# EAGLE board TSOC_NEOLED_28pin (EAGLE 6.6.0)
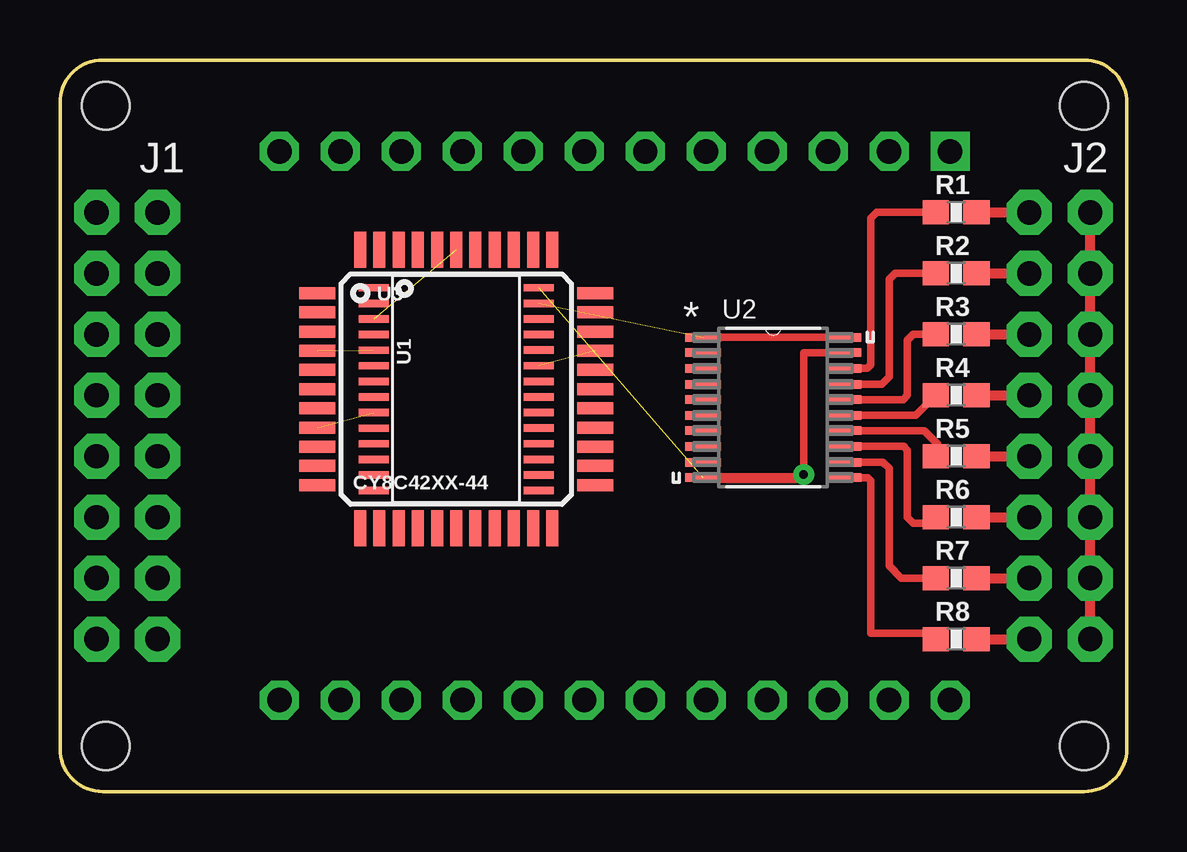
[diagram p0: board, top side]
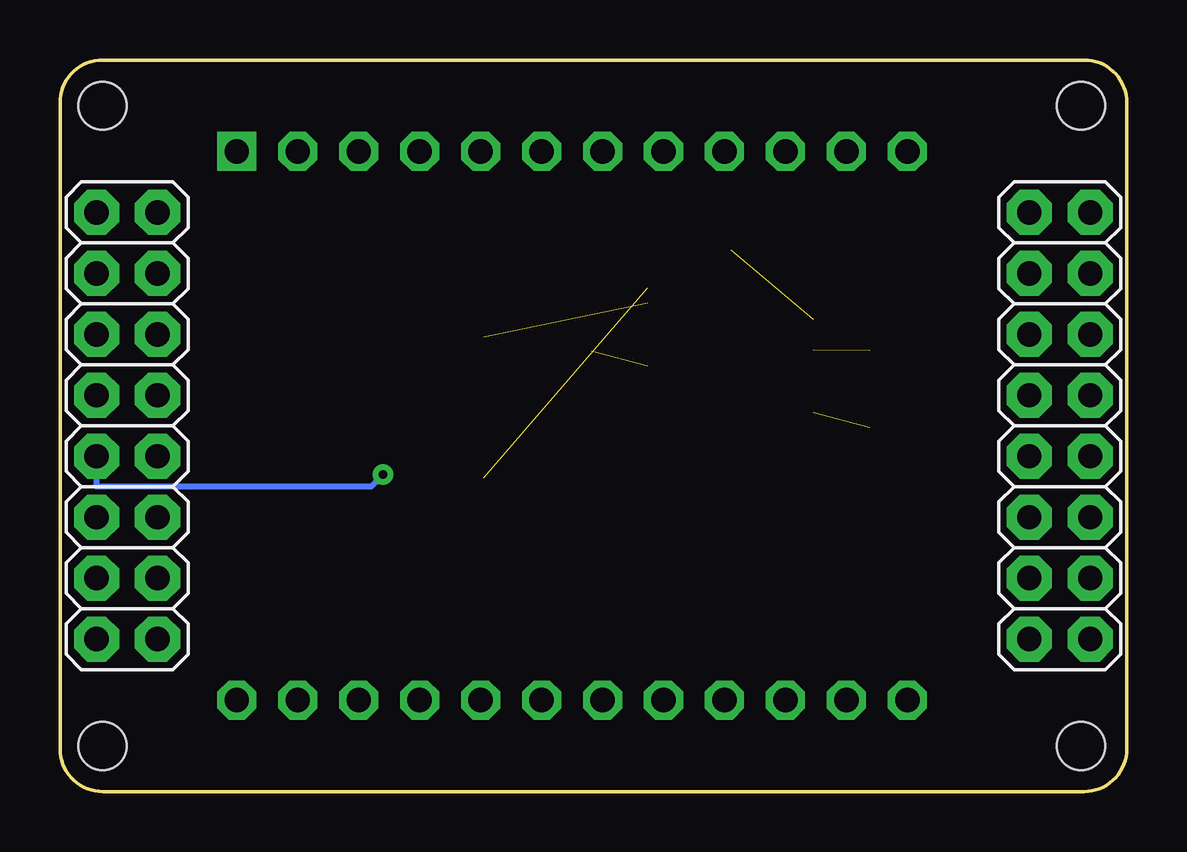
[diagram p1: board, bottom side, seen from below]

Size 44.45 x 30.48 mm. Coordinates in mm from the lower left corner, seen from the top.
Copper layers (1*16): Top 0.035mm / dielectric 1.5mm / Bottom 0.035mm
Design rules "PatternAgents_7mil": minimum track width 7mil, minimum drill 14mil, track to track 7mil, track to pad 7mil, pad to pad 7mil, via to via 7mil, smd to smd 7mil, copper to edge 7mil, drill to drill 7mil, minimum pad ring 12mil, minimum via ring 10mil, stop-mask expansion 4mil, vias tented up to drill 25mil, thermal gap 7mil

## Footprints (pad centres in the part's own frame; a part is rotated, then mirrored left to right if it is on the bottom)
2X8 = drill 1.016 pad 1.88 octagon: 1 0,0; 2 0,2.54; 3 2.54,0; 4 2.54,2.54; 5 5.08,0; 6 5.08,2.54; 7 7.62,0; 8 7.62,2.54; 9 10.16,0; 10 10.16,2.54; 11 12.7,0; 12 12.7,2.54; 13 15.24,0; 14 15.24,2.54; 15 17.78,0; 16 17.78,2.54
0603-RES = smd 1.1 x 1: 1 -0.85,0; 2 0.85,0
TSOC-BB-S24 = drill 1.016 square: 1B -11.43,-11.43 | drill 1.016 octagon: 1C -11.43,11.43; 2B -8.89,-11.43; 2C -8.89,11.43; 3B -6.35,-11.43; 3C -6.35,11.43; 4B -3.81,-11.43; 4C -3.81,11.43; 5B -1.27,-11.43; 5C -1.27,11.43; 6B 1.27,-11.43; 6C 1.27,11.43; 7B 3.81,-11.43; 7C 3.81,11.43; 8B 6.35,-11.43; 8C 6.35,11.43; 9B 8.89,-11.43; 9C 8.89,11.43; 10B 11.43,-11.43; 10C 11.43,11.43; 11B 13.97,-11.43; 11C 13.97,11.43; 12B 16.51,-11.43; 12C 16.51,11.43
SSOP28 = smd 0.305 x 1.245: 1 4.224,3.441; 2 3.574,3.441; 3 2.924,3.441; 4 2.274,3.441; 5 1.624,3.441; 6 0.974,3.441; 7 0.325,3.44; 8 -0.326,3.441; 9 -0.976,3.441; 10 -1.626,3.441; 11 -2.276,3.441; 12 -2.926,3.441; 13 -3.576,3.441; 14 -4.226,3.441; 15 -4.224,-3.441; 16 -3.574,-3.441; 17 -2.924,-3.441; 18 -2.274,-3.441; 19 -1.624,-3.441; 20 -0.974,-3.441; 21 -0.324,-3.441; 22 0.326,-3.441; 23 0.976,-3.441; 24 1.626,-3.441; 25 2.276,-3.441; 26 2.926,-3.441; 27 3.576,-3.441; 28 4.226,-3.441
SOP65P640X120-20N = smd 1.473 x 0.356: 1 -2.921,2.921; 2 -2.921,2.286; 3 -2.921,1.626; 4 -2.921,0.965; 5 -2.921,0.33; 6 -2.921,-0.33; 7 -2.921,-0.965; 8 -2.921,-1.626; 9 -2.921,-2.286; 10 -2.921,-2.921; 11 2.921,-2.921; 12 2.921,-2.286; 13 2.921,-1.626; 14 2.921,-0.965; 15 2.921,-0.33; 16 2.921,0.33; 17 2.921,0.965; 18 2.921,1.626; 19 2.921,2.286; 20 2.921,2.921
TQFP-10X10-44 = smd 1.5 x 0.5: 1 -5.8,4; 2 -5.8,3.2; 3 -5.8,2.4; 4 -5.8,1.6; 5 -5.8,0.8; 6 -5.8,0; 7 -5.8,-0.8; 8 -5.8,-1.6; 9 -5.8,-2.4; 10 -5.8,-3.2; 11 -5.8,-4; 23 5.8,-4; 24 5.8,-3.2; 25 5.8,-2.4; 26 5.8,-1.6; 27 5.8,-0.8; 28 5.8,0; 29 5.8,0.8; 30 5.8,1.6; 31 5.8,2.4; 32 5.8,3.2; 33 5.8,4 | smd 0.5 x 1.5: 12 -4,-5.8; 13 -3.2,-5.8; 14 -2.4,-5.8; 15 -1.6,-5.8; 16 -0.8,-5.8; 17 0,-5.8; 18 0.8,-5.8; 19 1.6,-5.8; 20 2.4,-5.8; 21 3.2,-5.8; 22 4,-5.8; 34 4,5.8; 35 3.2,5.8; 36 2.4,5.8; 37 1.6,5.8; 38 0.8,5.8; 39 0,5.8; 40 -0.8,5.8; 41 -1.6,5.8; 42 -2.4,5.8; 43 -3.2,5.8; 44 -4,5.8
TSOC-BB-BRD = hole 2: 1.905,1.905; 28.575,1.905; 1.905,42.672; 28.575,42.672

## Placement (x,y rotation side)
J1  [2X8]  4.06,24.13 270 bottom
J2  [2X8]  42.93,24.13 270 bottom
R1  [0603-RES]  37.34,24.13 0 top
R2  [0603-RES]  37.34,21.59 0 top
R3  [0603-RES]  37.34,19.05 0 top
R4  [0603-RES]  37.34,16.51 0 top
R5  [0603-RES]  37.34,13.97 0 top
R6  [0603-RES]  37.34,11.43 0 top
R7  [0603-RES]  37.34,8.89 0 top
R8  [0603-RES]  37.34,6.35 0 top
TSOC  TSOC-24-BB  [TSOC-BB-S24]  25.65,15.24 180 top
U1  CY8C4XXX-28  [SSOP28]  16.51,16.76 90 top
U2  SN74HC245PW  [SOP65P640X120-20N]  29.72,16 0 top
U3  CY8C42XX-44  [TQFP-10X10-44]  16.51,16.76 0 top
U$3  TSOC-PCB-SINGLE  [TSOC-BB-BRD]  0,30.48 270 top

## Library data of the parts
J1 J2 R1-R8 = PatternAgents-ProtoPads
TSOC U$3 = thingSoC
U1 U3 = PatternAgents-Cypress
U2 = PatternAgents-TI; MPN: SN74HC245PW; OC_FARNELL: 1236221; OC_NEWARK: 13M5213; PACKAGE: TSSOP-20; SUPPLIER: Texas Instruments

## Nets
!RST: U1.25
GND: J2.1 J2.3 J2.5 J2.7 J2.9 J2.11 J2.13 J2.15 U1.28 U2.10 U2.19
N$1: J2.2 R1.2
N$2: J2.4 R2.2
N$3: J2.6 R3.2
N$4: J2.8 R4.2
N$5: J2.10 R5.2
N$6: J2.12 R6.2
N$7: J2.14 R7.2
N$8: J2.16 R8.2
N$9: R1.1 U2.18
N$10: R2.1 U2.17
N$11: R3.1 U2.16
N$12: R4.1 U2.15
N$13: R5.1 U2.14
N$14: R6.1 U2.13
N$15: R7.1 U2.12
N$16: R8.1 U2.11
N$17: U2.2
N$18: U2.3
N$19: U2.4
N$20: U2.5
N$21: U2.6
N$22: U2.7
N$23: U2.8
N$24: U2.9
P0_0: U1.19
P0_1: U1.20
P0_2: U1.21
P0_3: U1.22
P0_6: U1.23 U3.30
P0_7: U1.24
P1_0: U1.1
P1_1: U1.2
P1_2: U1.3 U3.39
P1_7: U1.4
P2_2: U1.5 U3.4
P2_3: U1.6
P2_4: U1.7
P2_5: U1.8
P2_6: U1.9 U3.8
P2_7: U1.10
P3_0: U1.11
P3_1: U1.12
P3_2: U1.13
P3_3: U1.14
P3_6: U3.17
P4_0: U1.15
P4_1: U1.16
P4_2: U1.17
P4_3: U1.18
VCC: U1.27 U2.1 U2.20
VCCD: U1.26

## Tracks (layer width: path | path; a pad name or v marks a point on that pad's centre or on a via)
GND  (via drill 0.36)  (1 unrouted)
  Top 0.305: U2.19 30.99,18.29 v30.99,13.21
  Top 0.406: J2.15 J2.13 J2.11 J2.9 J2.7 J2.5 J2.3 J2.1 | U2.10 30.86,13.08 v30.99,13.21
  Bottom 0.254: v30.99,13.21 31.5,12.7 42.93,12.7 J2.9
N$1
  Top 0.406: R1.2 J2.2
N$2
  Top 0.406: R2.2 J2.4
N$3
  Top 0.406: R3.2 J2.6
N$4
  Top 0.406: R4.2 J2.8
N$5
  Top 0.406: R5.2 J2.10
N$6
  Top 0.406: R6.2 J2.12
N$7
  Top 0.406: R7.2 J2.14
N$8
  Top 0.406: R8.2 J2.16
N$9
  Top 0.305: U2.18 33.63,17.63 33.78,17.78 33.78,23.88 34.04,24.13 R1.1
N$10
  Top 0.305: U2.17 34.24,16.97 34.54,17.27 34.54,21.34 34.8,21.59 R2.1
N$11
  Top 0.305: U2.16 35.13,16.33 35.31,16.51 35.31,18.8 35.56,19.05 R3.1
N$12
  Top 0.305: U2.15 35.65,15.67 R4.1
N$13
  Top 0.305: U2.14 36.02,15.04 36.58,14.48 36.58,14.06 R5.1
N$14
  Top 0.305: U2.13 35.15,14.38 35.31,14.22 35.31,11.43 35.56,11.18 36.23,11.18 R6.1
N$15
  Top 0.305: U2.12 34.29,13.72 34.54,13.46 34.54,9.4 35.05,8.89 R7.1
N$16
  Top 0.305: U2.11 33.66,13.08 33.78,12.95 33.78,6.6 36.23,6.6 R8.1
P0_6  (1 unrouted)
P1_2  (1 unrouted)
P2_2  (1 unrouted)
P2_6  (1 unrouted)
VCC  (1 unrouted)
  Top 0.305: U2.20 U2.1